# Altium PCB main.PcbDoc
Units mm, origin at the board's own origin, x right, y up, seen from the top; angles counter-clockwise.
Board outline 95 x 95 mm, 2 copper layers (Top Layer, Bottom Layer); 33 components, 30 nets, 91 pads, 9 vias.
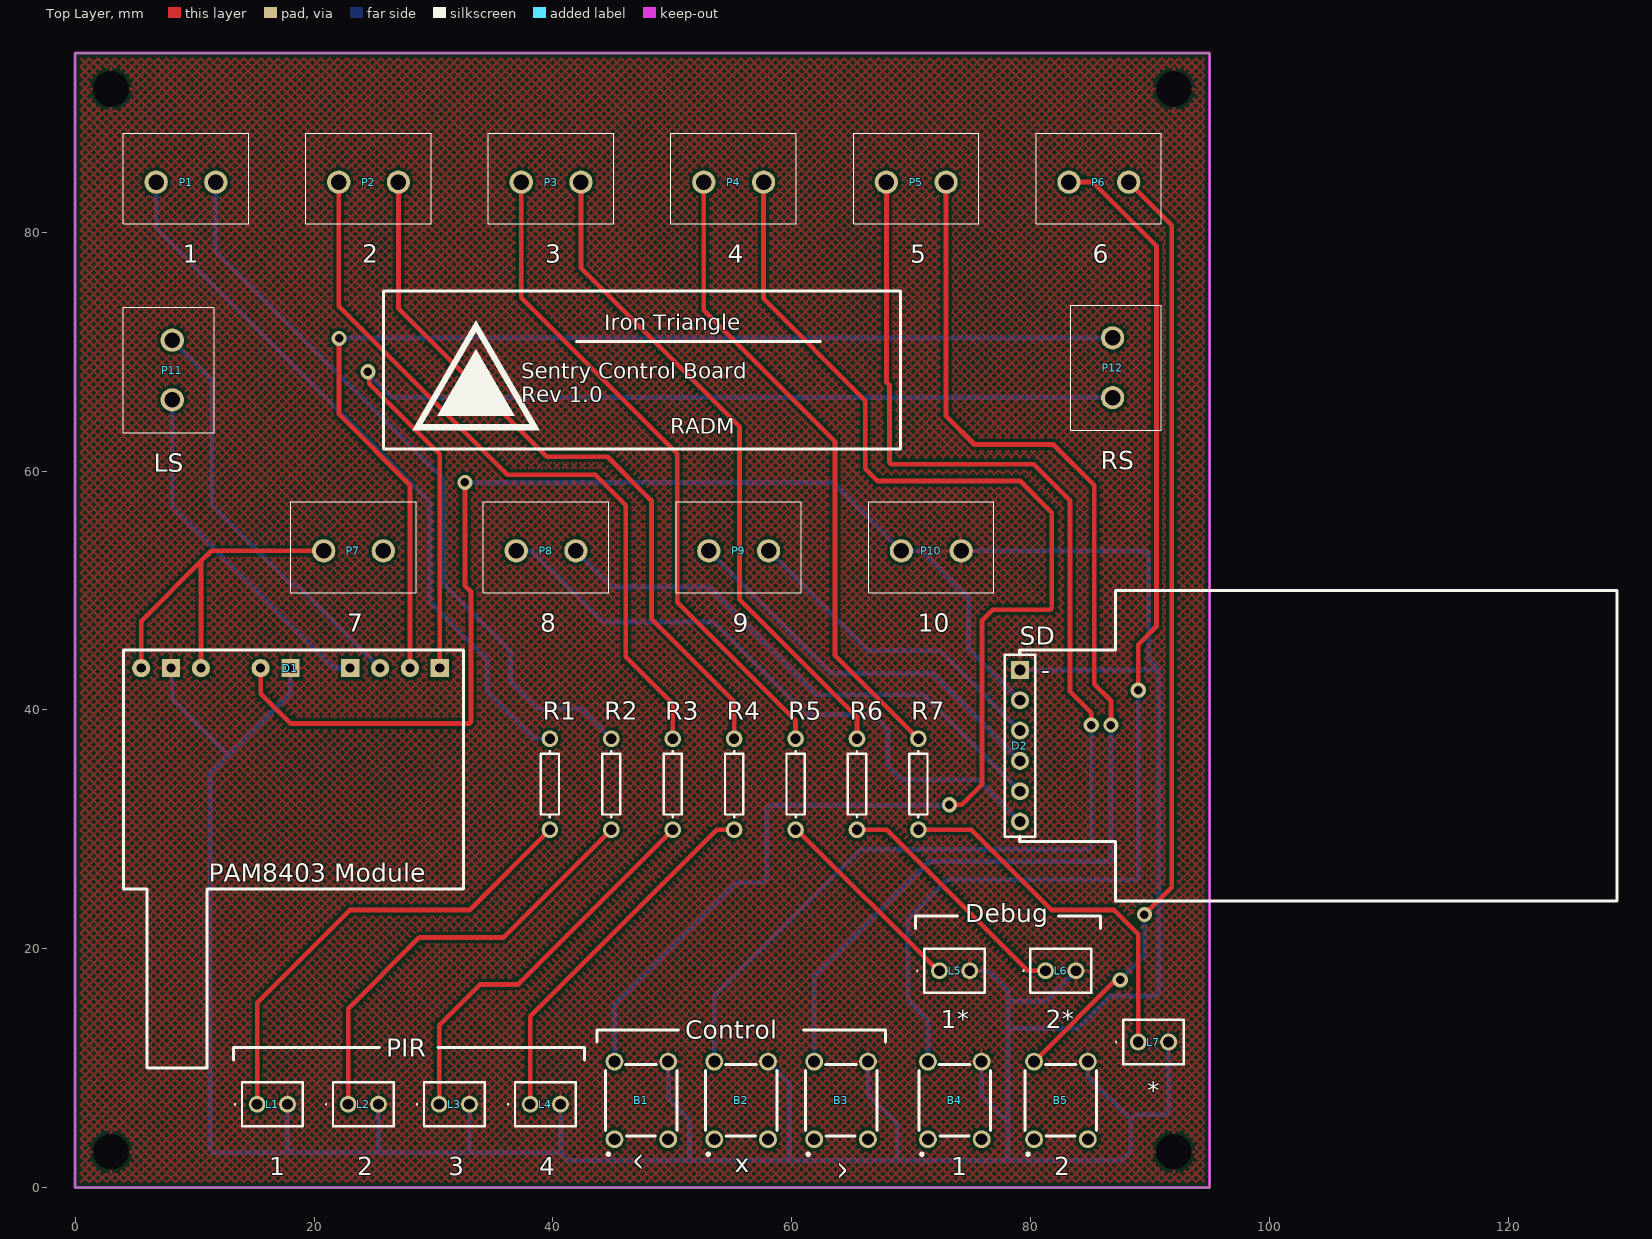
[diagram p0: Top Layer view]
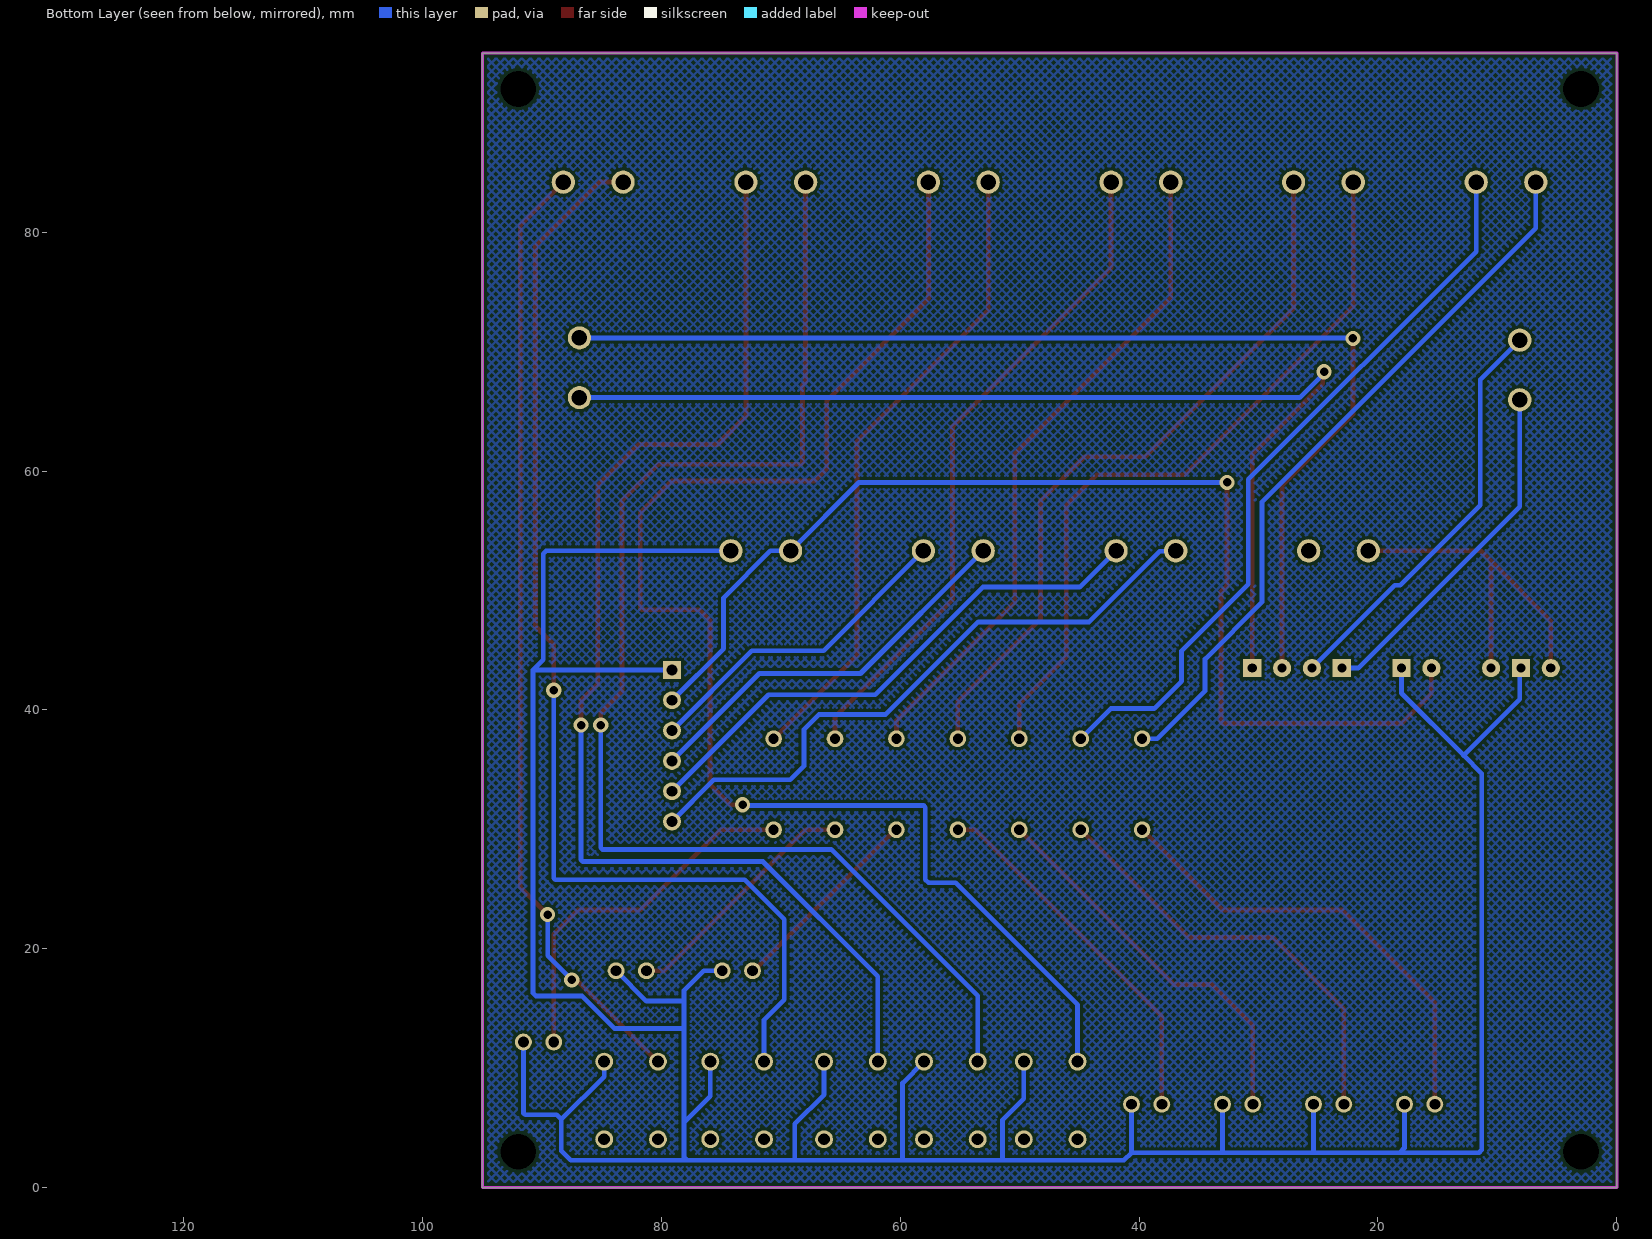
[diagram p1: Bottom Layer view, seen from below]

## Layer stack, top to bottom
Top Solder: solder mask 0.0102, Solder Resist, Dk 3.5
Top Layer: signal copper 0.0356
Dielectric 1: dielectric 0.32, FR-4, Dk 4.8
Bottom Layer: signal copper 0.0356
Bottom Solder: solder mask 0.0102, Solder Resist, Dk 3.5

## Board outline
0,0 95,0 95,95 0,95

## Design rules (kind name [scope] priority, off if disabled: settings)
Clearance [All] p1: gap=0.254 ignorepadtopadclearanceinfootprint=FALSE except(0: Arc-Hole Track-Hole SMDPad-Hole THPad-Hole Via-Hole Fill-Hole Poly-Hole Region-Hole Text-Hole)
PolygonConnect [All] p1: connectstyle=Relief reliefconductorwidth=0.254 reliefentries=4 polygonreliefangle="90 Angle" airgapwidth=0.254
RoutingVias [All] p1: holewidth=0.711 width=1.27 viastyle="Through Hole" minholewidth=0.711 minwidth=1.27 maxholewidth=0.711 maxwidth=1.27
SolderMaskExpansion [All] p1: expansion=0.102 istentingtop=FALSE
Width [All] p1: maxlimit=0.4 minlimit=0.25 preferedwidth=0.4
30 further rules are at their usual default settings.

## Components (designator, comment, footprint, x,y, rotation, side; value= is the part's Value field where it differs from the comment)
B1 "Button 1" FSM4JH 47.407,7.3 r90 top
B2 "Button 2" FSM4JH 55.771,7.3 r90 top
B3 "Button 3" FSM4JH 64.135,7.3 r90 top
B4 "LDR 1" FSM4JH 73.66,7.3 r90 top
B5 "LDR 2" FSM4JH 82.55,7.3 r90 top
D1 "Speaker Amp" "HiLetgo PAM8403 Amp Module" 32.53,45.004 r180 top
D2 "Header 6" HDR1X6 79.121,43.354 r270 top
L1 "" C5SMFRJECT0W0BB2 15.24,6.985 r0 top
L2 "" C5SMFRJECT0W0BB2 22.86,6.985 r0 top
L3 "" C5SMFRJECT0W0BB2 30.48,6.985 r0 top
L4 "" C5SMFRJECT0W0BB2 38.1,6.985 r0 top
L5 "" C5SMFRJECT0W0BB2 72.374,18.161 r0 top
L6 "" C5SMFRJECT0W0BB2 81.264,18.161 r0 top
L7 "" C5SMFRJECT0W0BB2 89.027,12.192 r0 top
P1 "" TB00250002BE 6.78,84.202 r0 top
P2 "" TB00250002BE 22.068,84.202 r0 top
P3 "" TB00250002BE 37.356,84.202 r0 top
P4 "" TB00250002BE 52.644,84.202 r0 top
P5 "" TB00250002BE 67.932,84.202 r0 top
P6 "" TB00250002BE 83.22,84.202 r0 top
P7 "" TB00250002BE 20.806,53.324 r0 top
P8 "" TB00250002BE 36.935,53.324 r0 top
P9 "" TB00250002BE 53.064,53.324 r0 top
P10 "" TB00250002BE 69.193,53.324 r0 top
P11 "" TB00250002BE 8.13,65.968 r90 top
P12 "" TB00250002BE 86.87,71.158 r270 top
R1 "230 Ohm" AXIAL-0.3 39.752,33.782 r270 top value=230
R2 "230 Ohm" AXIAL-0.3 44.896,33.782 r270 top value=230
R3 "230 Ohm" AXIAL-0.3 50.039,33.782 r270 top value=230
R4 "230 Ohm" AXIAL-0.3 55.183,33.782 r270 top value=230
R5 "230 Ohm" AXIAL-0.3 60.326,33.782 r270 top value=230
R6 "230 Ohm" AXIAL-0.3 65.47,33.782 r270 top value=230
R7 "230 Ohm" AXIAL-0.3 70.613,33.782 r270 top value=230

## Footprints (in the part's own frame and the unit in brackets; to place one, negate y for a bottom-side part, rotate by r counter-clockwise, add the part's x,y. Pads: shape width x height; smd on the part's side, far side on the other; paste and mask are expansions set on the pad)
AXIAL-0.3 [mm] "Axial Device, Thru-Hole; 2 Leads; 0.3 in Pin Spacing"
  round 1.4 hole 0.85: 1(-3.81,0) 2(3.81,0)
  silkscreen extent -2.77,-0.76 2.77,0.76
C5SMFRJECT0W0BB2 [mm]
  round 1.416 hole 0.91: 1(0,0) 2(2.54,0)
  silkscreen extent -1.9,-1.85 3.81,1.85, body extent -1.28,-1.85 3.82,1.85, height 8.85
FSM4JH [mm]
  round 1.5 hole 1: 1(-3.25,2.25) 2(3.25,2.25) 3(-3.25,-2.25) 4(3.25,-2.25)
  silkscreen extent -4.6,-3 3,3, body extent -3.82,-3 3.98,3, height 7.61
HDR1X6 [mm] "Connector; Header; 6 Position"
  rect 1.5x1.5 hole 0.9: 1(0,0)
  round 1.5 hole 0.9: 2(2.54,0) 3(5.08,0) 4(7.62,0) 5(10.16,0) 6(12.7,0)
  silkscreen extent -1.27,-1.27 13.97,1.27
"HiLetgo PAM8403 Amp Module" [mil] "https://www.amazon.com/dp/B01DKAI51M?psc=1&smid=A30QSGOJR8LMXA&ref_=chk_typ_imgToDp"
  rect 60x60 hole 30: 1(78.74,59.06) 4(374.02,59.06) 5(570.87,59.06) 8(964.57,59.06)
  round 60 hole 30: 2(177.17,59.06) 3(275.59,59.06) 6(669.29,59.06) 7(866.14,59.06) 9(1062.99,59.06)
  silkscreen extent 0,0 1122,1378
TB00250002BE [mm]
  round 1.95 hole 1.3: 1(0,0) 2(5,0)
  silkscreen extent -2.75,-3.5 7.75,4.1, body extent -2.51,-4.08 7.99,3.52, height 9.99

## Part data
B1 B2 B3 B4 B5: library part FSM2JAH, "Tactile Pushbutton", Manufacturer_Name="TE Connectivity", Mouser Part Number=506-FSM2JAH, Datasheet Link=http://www.te.com/commerce/DocumentDelivery/DDEController?Action=showdoc&DocId=Customer+Drawing%7F1825910%7FC9%7Fpdf%7FEnglish%7FENG_CD_1825910_C9.pdf%7F1825910-3, Manufacturer_Part_Number=FSM2JAH, Mouser Price/Stock=https://www.mouser.co.uk/ProductDetail/TE-Connectivity-PB/FSM2JAH?qs=Of7OaoM7rsH02ckr%252BGLHNA%3D%3D
D1: library part "HiLetgo PAM8403 Module", "https://www.amazon.com/dp/B01DKAI51M?psc=1&smid=A30QSGOJR8LMXA&ref_=chk_typ_imgToDp"
D2: "Header, 6-Pin", LatestRevisionDate=17-Jul-2002, LatestRevisionNote="Re-released for DXP Platform.", Publisher="Altium Limited"
L1 L2 L3 L4 L5 L6 L7: library part C5SMF-RJE-CT0W0BB2, "LED", Manufacturer_Name=Wolfspeed, Mouser Part Number=941-C5SMFRJECT0W0BB2, Arrow Part Number=C5SMF-RJE-CT0W0BB2, Arrow Price/Stock=https://www.arrow.com/en/products/c5smf-rje-ct0w0bb2/cree-led?region=nac, Datasheet Link=https://www.mouser.com/datasheet/2/723/C5SMF_RJF_RJE_GJF_GJE_BJF_BJE_1240-2256911.pdf, Height=8.75mm, Manufacturer_Part_Number=C5SMF-RJE-CT0W0BB2, Mouser Price/Stock=https://www.mouser.co.uk/ProductDetail/Cree-LED/C5SMF-RJE-CT0W0BB2?qs=1sbE9T7hb3bz%2FXMFB8lsHw%3D%3D
P1 P2 P3 P4 P5 P6 P7 P8 P9 P10 P11 P12: library part TB002-500-02BE, "Connector", Manufacturer_Name="CUI Devices", Mouser Part Number=490-TB002-500-02BE, Arrow Part Number=TB002-500-02BE, Arrow Price/Stock=https://www.arrow.com/en/products/tb002-500-02be/cui-devices?region=nac, Datasheet Link=https://eu.mouser.com/datasheet/2/670/tb002_500-1550579.pdf, Height=10.4mm, Manufacturer_Part_Number=TB002-500-02BE, Mouser Price/Stock=https://www.mouser.co.uk/ProductDetail/CUI-Devices/TB002-500-02BE?qs=vLWxofP3U2x9716kcgva%2Fw%3D%3D
R1 R2 R3 R4 R5 R6 R7: library part Res1, "Resistor", LatestRevisionDate=17-Jul-2002, LatestRevisionNote="Re-released for DXP Platform.", PackageDescription="Axial Device, Thru-Hole; 2 Leads; 0.3 in Pin Spacing", PackageReference=AXIAL-0.3, Published=8-Jun-2000, Publisher="Altium Limited"

## Free pads (board coordinates)
  round 1.524 hole 3: H1(3,3) H2(3,92) H3(92,3) H4(92,92)

## Via types
v1: diameter 1.27, hole 0.711, Top Layer to Bottom Layer, 9 vias

## Nets (pads, with @x,y where several pads share a name; then routed paths per layer and width w, separated by ;. In a path a pad name is that pad's centre, name@x,y a point inside that pad or via, vN(x,y) a via of type N, cw(c..) or ccw(c..) an arc to the next point about the centre after c; other vN are vias at no path point)
+5V: D1.6 D2.2 P10.1 | length 97.6
  Top Layer w0.4: D1.6 15.53,41.366 18.034,38.862 33.001,38.862 33.147,39.008 33.147,49.911 32.639,50.419 v1(32.639,59.055)
  Bottom Layer w0.4: v1(32.639,59.055) 63.462,59.055 P10.1 70.882,53.324 74.803,49.403 74.803,45.132 D2.2
b1: B1.2 P4.2 | length 119.5
  Top Layer w0.4: P4.2 57.644,74.436 66.167,65.913 66.167,60.198 67.183,59.182 79.121,59.182 81.788,56.515 81.788,48.533 81.642,48.387 76.835,48.387 75.946,47.498 75.946,33.782 74.231,32.067 v1(73.215,32.067)
  Bottom Layer w0.4: B1.2 45.157,15.312 55.372,25.527 57.639,25.527 57.912,25.8 57.912,31.858 58.058,32.004 73.152,32.004 v1(73.215,32.067) v1@73.279,32.131
b2: B2.2 P5.1 | length 112.2
  Top Layer w0.4: P5.1 67.932,67.45 68.199,67.183 68.199,60.725 68.345,60.579 80.264,60.579 83.312,57.531 83.312,41.529 85.09,39.751 v1(85.09,38.735)
  Bottom Layer w0.4: B2.2 53.521,16.056 65.786,28.321 84.944,28.321 85.09,28.467 v1(85.09,38.735) v1@85.09,38.862
b3: B3.2 P5.2 | length 102.4
  Top Layer w0.4: P5.2 72.932,64.609 75.311,62.23 81.915,62.23 85.344,58.801 85.344,42.164 86.741,40.767 v1(86.741,38.735)
  Bottom Layer w0.4: B3.2 61.885,17.689 71.501,27.305 86.595,27.305 86.741,27.451 v1(86.741,38.735)
b4: B4.2 P6.1 | length 96.7
  Top Layer w0.4: P6.1 85.216,84.202 90.551,78.867 90.551,46.99 89.027,45.466 v1(89.027,41.656)
  Bottom Layer w0.4: B4.2 71.41,14.061 69.723,15.748 69.723,22.479 73.025,25.781 88.881,25.781 89.027,25.927 v1(89.027,41.656) v1@89.027,41.91
b5: B5.2 P6.2 | length 80.5
  Top Layer w0.4: B5.2 87.149,17.399 v1(87.517,17.399) v1@87.884,17.399 ; P6.2 91.821,80.601 91.821,25.146 v1(89.535,22.86)
  Bottom Layer w0.4: v1(87.517,17.399) 89.535,19.417 v1(89.535,22.86)
GND: B1.4 B2.4 B3.4 B4.4 B5.4 D1.5 D1.8 D2.1 L1.2 L2.2 L3.2 L4.2 L5.2 L6.2 L7.2 P10.2 pad.H1 pad.H2 pad.H3 pad.H4 | length 301.7
  Bottom Layer w0.4: D1.8 8.128,43.406 8.128,40.894 12.829,36.193 ; L1.2 17.78,3.324 18.185,2.919 ; D1.5 18.03,41.393 12.829,36.193 ; L2.2 25.4,3.046 25.527,2.919 ; L3.2 33.02,2.919 ; L4.2 40.64,2.919 ; B1.4 49.657,7.454 51.435,5.676 51.435,2.284 ; B2.4 59.817,8.754 59.817,2.284 ; B3.4 66.385,7.79 68.834,5.341 68.834,2.284 ; P10.2 89.666,53.324 89.9,53.09 89.9,44.212 90.758,43.354 ; L5.2 76.454,18.161 78.105,16.51 78.105,15.621 ; B4.4 75.91,7.663 78.105,5.468 ; D2.1 90.758,43.354 ; L6.2 81.264,15.621 78.105,15.621 ; B5.4 84.8,9.302 88.39,5.713 ; L7.2 91.567,6.245 91.418,6.096 88.773,6.096 88.39,5.713 ; 12.829,36.193 11.305,34.669 11.305,3.153 11.54,2.919 18.185,2.919 ; 18.185,2.919 25.527,2.919 ; 25.527,2.919 33.02,2.919 ; 33.02,2.919 40.64,2.919 ; 40.64,2.919 41.275,2.284 51.435,2.284 ; 51.435,2.284 59.817,2.284 ; 59.817,2.284 68.834,2.284 ; 68.834,2.284 77.849,2.284 ; 77.849,2.284 87.606,2.284 88.39,3.067 88.39,5.713 ; 77.849,2.284 78.105,2.54 78.105,5.468 ; 78.105,5.468 78.105,13.335 ; 78.105,13.335 78.105,15.621 ; 78.105,13.335 83.947,13.335 86.661,16.049 90.524,16.049 90.758,16.283 90.758,43.354
ldr1Led: P3.1 R5.1 | length 56.1
  Top Layer w0.4: P3.1 37.356,74.531 50.419,61.468 50.419,49.022 60.326,39.115 R5.1
ldr2Led: P3.2 R6.1 | length 56.2
  Top Layer w0.4: P3.2 42.356,77.024 55.626,63.754 55.626,49.276 65.47,39.432 R6.1
ldrGLed: P4.1 R7.1 | length 54.1
  Top Layer w0.4: P4.1 52.644,73.467 63.627,62.484 63.627,44.578 R7.1
lOut+: D1.3 P11.2 | length 34.9
  Bottom Layer w0.4: P11.2 11.43,67.668 11.43,57.15 18.131,50.449 18.585,50.449 D1.3
lOut-: D1.4 P11.1 | length 29.4
  Bottom Layer w0.4: P11.1 8.13,57.021 21.647,43.504 D1.4
NetL1_1: L1.1 R1.2 | length 39
  Top Layer w0.4: L1.1 15.24,15.494 22.987,23.241 33.021,23.241 R1.2
NetL2_1: L2.1 R2.2 | length 36.2
  Top Layer w0.4: L2.1 22.86,14.986 28.829,20.955 35.879,20.955 R2.2
NetL3_1: L3.1 R3.2 | length 32.9
  Top Layer w0.4: L3.1 30.48,13.589 33.909,17.018 37.085,17.018 R3.2
NetL4_1: L4.1 R4.2 | length 30.9
  Top Layer w0.4: L4.1 38.1,14.351 53.721,29.972 R4.2
NetL5_1: L5.1 R5.2 | length 16.9
  Top Layer w0.4: R5.2 60.445,29.972 72.256,18.161 L5.1
NetL6_1: L6.1 R6.2 | length 20.7
  Top Layer w0.4: R6.2 67.945,29.972 79.756,18.161 L6.1
NetL7_1: L7.1 R7.2 | length 31.1
  Top Layer w0.4: R7.2 75.057,29.972 81.788,23.241 86.995,23.241 89.027,21.209 L7.1
pirLed1: P1.1 R1.1 | length 61
  Bottom Layer w0.4: P1.1 6.78,80.342 29.718,57.404 29.718,49.022 34.48,44.259 34.48,41.593 38.481,37.592 R1.1
pirLed2: P1.2 R2.1 | length 62.4
  Bottom Layer w0.4: P1.2 11.78,78.39 30.861,59.309 30.861,50.546 36.449,44.958 36.449,42.418 38.752,40.115 42.372,40.115 R2.1
pirLed3: P2.1 R3.1 | length 62.5
  Top Layer w0.4: P2.1 22.068,73.817 36.195,59.69 43.561,59.69 46.101,57.15 46.101,44.45 50.039,40.512 R3.1
pirLed4: P2.2 R4.1 | length 61.2
  Top Layer w0.4: P2.2 27.068,73.643 39.497,61.214 44.577,61.214 48.26,57.531 48.26,47.625 55.183,40.702 R4.1
rOut+: D1.2 P12.1 | length 94.7
  Top Layer w0.4: v1(22.098,71.12) 22.098,64.77 28.03,58.838 D1.2
  Bottom Layer w0.4: v1@22.263,71.158 P12.1
rOut-: D1.1 P12.2 | length 90.3
  Top Layer w0.4: v1(24.511,68.326) 24.632,68.205 24.632,67.316 30.53,61.418 D1.1
  Bottom Layer w0.4: v1@24.638,68.072 26.552,66.158 P12.2
SD_CS: D2.6 P8.1 | length 53.4
  Bottom Layer w0.4: P8.1 36.977,53.282 38.285,53.282 44.196,47.371 53.467,47.371 61.214,39.624 66.802,39.624 68.072,38.354 68.072,35.306 69.215,34.163 75.612,34.163 D2.6
SD_MISO: D2.3 P9.2 | length 27.3
  Bottom Layer w0.4: P9.2 66.43,44.958 72.437,44.958 D2.3
SD_MOSI: D2.4 P9.1 | length 33.3
  Bottom Layer w0.4: P9.1 63.335,43.053 71.802,43.053 D2.4
SD_SCK: D2.5 P8.2 | length 45.5
  Bottom Layer w0.4: P8.2 44.967,50.292 53.086,50.292 62.103,41.275 71.04,41.275 D2.5
SPEAKER: D1.7 D1.9 P7.1 | length 30.6
  Top Layer w0.4: D1.9 5.53,47.44 10.53,52.44 ; D1.7 10.53,52.44 ; P7.1 11.414,53.324 10.53,52.44
pads on no net: B1.1 B1.3 B2.1 B2.3 B3.1 B3.3 B4.1 B4.3 B5.1 B5.3 P7.2

## Polygon pours and split planes (outlines as drawn)
no net on Bottom Layer "NONET_L02_P000" (hatched 45Degree grid 0.508 track 0.203, pour order 0): 0,0 95,0 95,95 0,95
GND on Top Layer "GND_L01_P002" (hatched 45Degree grid 0.508 track 0.203, pour order 2): 0,0 95,0 95,95 0,95

## Keep-outs
Keep-Out Layer:
  the board outline again, w0.254

## Silkscreen, mask and mechanical layers (free items; w line width, h text height)
Top Overlay:
  drawing of 28 lines, arcs and shapes, not listed
  text "1" at 9.026,77.44 h1.52
  text "2" at 24.06,77.44 h1.52
  text "3" at 39.348,77.44 h1.52
  text "4" at 54.636,77.44 h1.52
  text "5" at 69.924,77.44 h1.52
  text "6" at 85.212,77.44 h1.52
  text "Iron Triangle" at 44.291,71.807 h1.3
  text "Sentry Control Board / Rev 1.0" at 37.343,65.786 h1.3
  text "RADM" at 49.814,63.119 h1.3
  text "RS" at 85.9,60.146 h1.52
  text "LS" at 6.56,59.956 h1.52
  text "7" at 22.798,46.562 h1.52
  text "8" at 38.927,46.562 h1.52
  text "9" at 55.056,46.562 h1.52
  text "10" at 70.55,46.562 h1.52
  text "SD" at 79.121,45.466 h1.52
  text "-" at 80.899,42.592 h1.52
  text "Debug" at 74.55,22.241 h1.52
  text "1*" at 72.501,13.335 h1.52
  text "2*" at 81.264,13.335 h1.52
  text "Control" at 51.074,12.455 h1.52
  text "PIR" at 26.036,10.967 h1.52
  text "*" at 89.789,7.366 h1.52
  text "^" at 63.081,2.286 h1.52 r270
  text "^" at 48.385,1.27 h1.52 r90
  text "x" at 55.225,1.27 h1.52
  text "1" at 16.256,1.016 h1.52
  text "2" at 23.622,1.016 h1.52
  text "3" at 31.242,1.016 h1.52
  text "4" at 38.862,1.016 h1.52
  text "1" at 73.368,1.016 h1.52
  text "2" at 82.004,1.016 h1.52

## Text inside footprints (layer, text, board x,y; h text height)
D1: Top Overlay "PAM8403 Module" at 11.172,25.597 h1.52